# Altium PCB PCB_DataAcq.PcbDoc (part 2 of 2)
Units mm, origin at the board's own origin, x right, y up, seen from the top; angles counter-clockwise.
Board outline 85 x 89.03 mm, 4 copper layers (Top Layer, Top Ground, Bottom Ground, Bottom Layer), stack 1.58 mm thick; 137 components, 89 nets, 495 pads, 1207 vias.
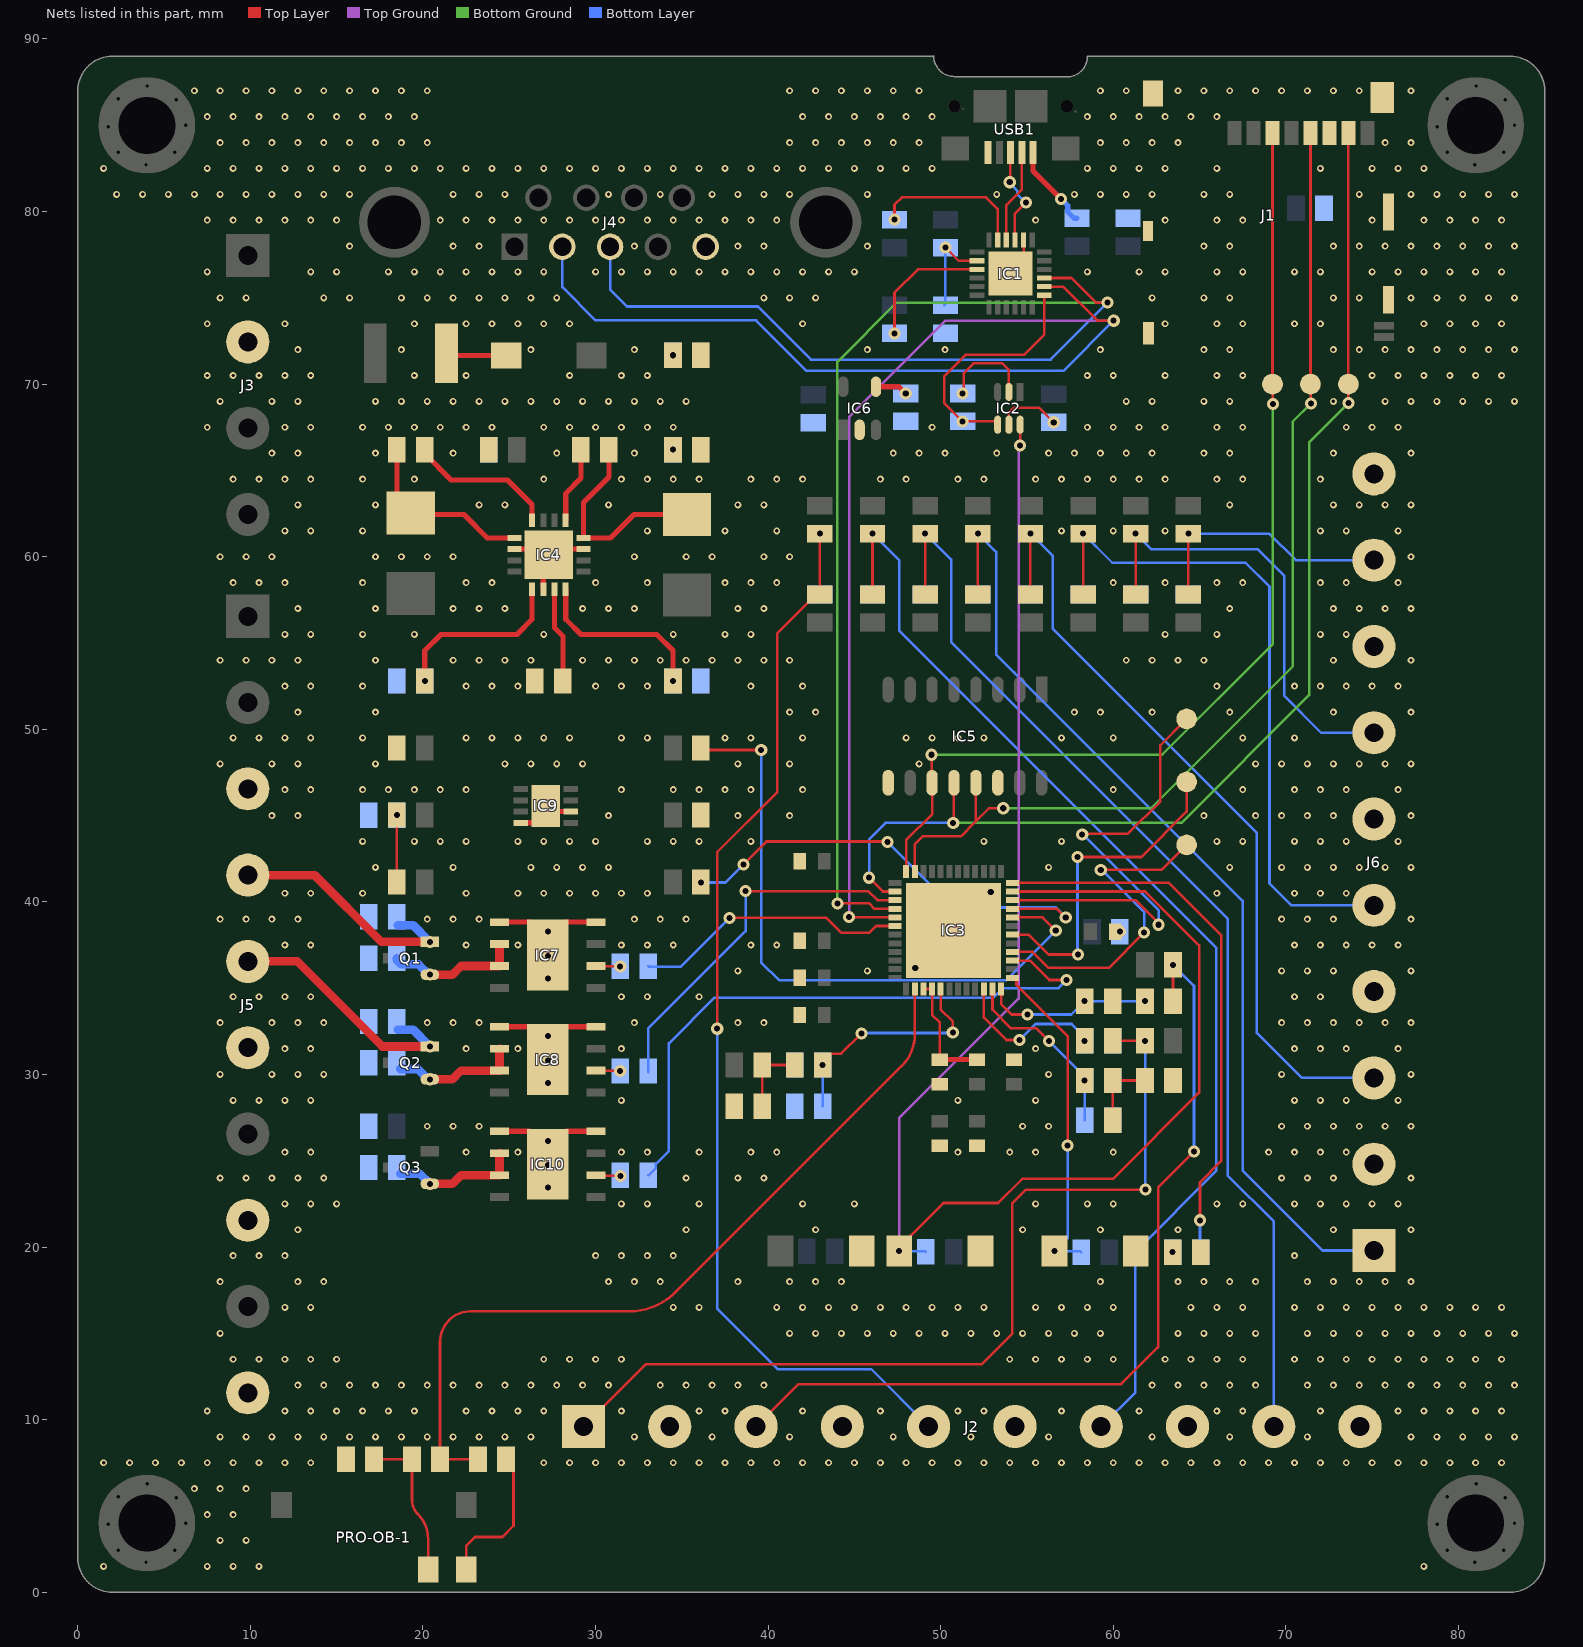
[diagram p4: the nets of this part, all layers, seen from the top]

## Via types
v1: diameter 0.4, hole 0.2, Top Layer to Bottom Layer, tented both sides, 1061 vias
v2: diameter 0.7, hole 0.35, Top Layer to Bottom Layer, tented both sides, 146 vias

## Nets (pads, with @x,y where several pads share a name; then routed paths per layer and width w, separated by ;. In a path a pad name is that pad's centre, name@x,y a point inside that pad or via, vN(x,y) a via of type N, cw(c..) or ccw(c..) an arc to the next point about the centre after c; other vN are vias at no path point) (continued)
GND: 3V3.2 5V.2 BOOT.1 C1.2 C2.2 C3.2 C4.2 C5.2 C6.1 C7.1 C8.1 C9.1 C10.2 C11.2 C12.2 C15.2 C16.1 C17.1 C18.1 C19.1 C20.1 C21.2 C24.2 C25.2 C26.1 C27.1 C28.1 C29.1 C32.1 C33.1 C34.1 C35.1 C36.1 C37.1 C38.1 C39.2 C40.1 D2.2 D3.2 IC1.2 IC1.25 IC3.49 IC4.6 IC4.10 IC4.15 IC4.17 IC5.9 IC5.14 IC6.2 IC7.4 IC7.5 IC7.9 IC8.4 IC8.5 IC8.9 IC9.2 IC9.8 IC9.9 IC10.4 IC10.5 IC10.9 J1.6 J1.11 J1.12 J1.13 J1.14 J1.15 J1.16 J2.2 J2.4 J2.6 J2.8 J2.10 J3.2 J4.5 J5.3 J5.6 J5.8 J5.10 J6.2 J6.4 J6.6 J6.8 J6.10 ON.2 PRO-OB-1.1 R21.1 R31.1 R32.1 R36.2 R39.2 R43.1 R44.1 R49.1 R50.1 R51.1 R52.1 RESET.1 START.1 USB1.5 | length 49.1
  Top Layer w0.15: PRO-OB-1.1@22.5,1.32 22.5,2.675 23.025,3.2 24.595,3.2 25.245,3.85 25.245,7.265 C16.1@24.81,7.7 ; IC1.25@54.052,76.4 54.802,77.15 IC1.2@54.802,78.35
  Top Layer w0.3: IC10.5@24.438,26.705 26.183,26.705 IC10.9@27.238,25.65 ; IC8.5@24.438,32.765 26.183,32.765 IC8.9@27.238,31.71 ; IC7.5@24.438,38.825 26.183,38.825 IC7.9@27.238,37.77 ; IC4.6@25.296,60.439 26.971,60.439 IC4.17@27.296,60.114 ; IC9.8@25.669,44.582 26.444,44.582 27.119,45.257 IC9.9@27.119,45.557 27.444,45.232 IC9.2@28.569,45.232 ; IC4.10@26.971,58.114 26.971,59.789 IC4.17@27.296,60.114 ; IC10.9@27.238,24.8 IC10.9@27.238,25.65 ; IC8.9@27.238,30.86 IC8.9@27.238,31.71 ; IC7.9@27.238,36.92 IC7.9@27.238,37.77 ; IC4.15@29.296,60.439 27.621,60.439 IC4.17@27.296,60.114 ; IC10.4@30.038,26.705 28.293,26.705 IC10.9@27.238,25.65 ; IC8.4@30.038,32.765 30.033,32.76 28.288,32.76 IC8.9@27.238,31.71 ; IC7.4@30.038,38.825 28.293,38.825 IC7.9@27.238,37.77 ; v2(48.525,36.175) 48.568,36.175 IC3.49@50.737,38.344 50.737,38.412 v2(52.9,40.575)
  other v1: 1.5,1.5 7.5,1.5 9,1.5 10.5,1.5 78,1.5 8.25,3 9.75,3 7.5,4.5 9,4.5 6.75,6 8.25,6 9.75,6 1.5,7.5 3,7.5 4.5,7.5 6,7.5 7.5,7.5 9,7.5 10.5,7.5 12,7.5 13.5,7.5 27,7.5 28.5,7.5 30,7.5 31.5,7.5 33,7.5 34.5,7.5 36,7.5 37.5,7.5 39,7.5 40.5,7.5 42,7.5 43.5,7.5 45,7.5 46.5,7.5 48,7.5 49.5,7.5 51,7.5 52.5,7.5 54,7.5 55.5,7.5 57,7.5 58.5,7.5 60,7.5 61.5,7.5 63,7.5 64.5,7.5 66,7.5 67.5,7.5 69,7.5 70.5,7.5 72,7.5 73.5,7.5 75,7.5 76.5,7.5 78,7.5 79.5,7.5 81,7.5 82.5,7.5 8.25,9 9.75,9 11.25,9 12.75,9 14.25,9 15.75,9 17.25,9 18.75,9 20.25,9 21.75,9 23.25,9 24.75,9 26.25,9 32.25,9 36.75,9 41.25,9 47.25,9 51.75,9 56.25,9 62.25,9 66.75,9 71.25,9 77.25,9 78.75,9 80.25,9 81.75,9 83.25,9 7.5,10.5 12,10.5 13.5,10.5 15,10.5 16.5,10.5 18,10.5 19.5,10.5 22.5,10.5 24,10.5 25.5,10.5 27,10.5 31.5,10.5 36,10.5 37.5,10.5 42,10.5 46.5,10.5 51,10.5 52.5,10.5 57,10.5 61.5,10.5 66,10.5 67.5,10.5 72,10.5 76.5,10.5 78,10.5 79.5,10.5 81,10.5 82.5,10.5 12.75,12 14.25,12 15.75,12 17.25,12 18.75,12 20.25,12 21.75,12 23.25,12 24.75,12 26.25,12 27.75,12 29.25,12 30.75,12 33.75,12 35.25,12 36.75,12 38.25,12 39.75,12 62.25,12 63.75,12 65.25,12 66.75,12 68.25,12 71.25,12 72.75,12 74.25,12 75.75,12 77.25,12 78.75,12 80.25,12 81.75,12 83.25,12 9,13.5 10.5,13.5 12,13.5 13.5,13.5 15,13.5 27,13.5 28.5,13.5 30,13.5 31.5,13.5 54,13.5 55.5,13.5 57,13.5 58.5,13.5 60,13.5 63,13.5 64.5,13.5 66,13.5 67.5,13.5 70.5,13.5 72,13.5 73.5,13.5 75,13.5 76.5,13.5 78,13.5 79.5,13.5 81,13.5 82.5,13.5 8.25,15 41.25,15 42.75,15 44.25,15 45.75,15 47.25,15 48.75,15 50.25,15 51.75,15 53.25,15 54.75,15 56.25,15 57.75,15 59.25,15 63.75,15 65.25,15 66.75,15 68.25,15 71.25,15 72.75,15 74.25,15 75.75,15 77.25,15 78.75,15 80.25,15 81.75,15 83.25,15 12,16.5 13.5,16.5 34.5,16.5 36,16.5 40.5,16.5 42,16.5 43.5,16.5 45,16.5 46.5,16.5 48,16.5 49.5,16.5 51,16.5 52.5,16.5 55.5,16.5 57,16.5 58.5,16.5 60,16.5 64.5,16.5 66,16.5 67.5,16.5 70.5,16.5 72,16.5 73.5,16.5 75,16.5 76.5,16.5 78,16.5 79.5,16.5 81,16.5 82.5,16.5 8.25,18 12.75,18 14.25,18 30.75,18 32.25,18 33.75,18 38.25,18 41.25,18 42.75,18 44.25,18 59.25,18 63.75,18 65.25,18 66.75,18 68.25,18 71.25,18 72.75,18 74.25,18 75.75,18 77.25,18 9,19.5 10.5,19.5 12,19.5 30,19.5 31.5,19.5 33,19.5 34.5,19.5 70.5,19.5 12.75,21 35.25,21 42.75,21 54.75,21 59.25,21 63.75,21 72.75,21 77.25,21 12,22.5 13.5,22.5 15,22.5 31.5,22.5 33,22.5 36,22.5 42,22.5 45,22.5 55.5,22.5 58.5,22.5 60,22.5 66,22.5 67.5,22.5 70.5,22.5 72,22.5 73.5,22.5 75,22.5 76.5,22.5 8.25,24 9.75,24 11.25,24 12.75,24 14.25,24 35.25,24 38.25,24 39.75,24 69.75,24 71.25,24 72.75,24 77.25,24 12,25.5 13.5,25.5 22.5,25.5 25.5,25.5 31.5,25.5 33,25.5 36,25.5 39,25.5 40.5,25.5 51,25.5 54,25.5 55.5,25.5 60,25.5 69,25.5 70.5,25.5 72,25.5 73.5,25.5 20.25,27 21.75,27 23.25,27 54.75,27 56.25,27 69.75,27 71.25,27 72.75,27 74.25,27 75.75,27 77.25,27 9,28.5 10.5,28.5 12,28.5 13.5,28.5 31.5,28.5 51,28.5 55.5,28.5 70.5,28.5 72,28.5 73.5,28.5 76.5,28.5 8.25,30 11.25,30 12.75,30 14.25,30 56.25,30 69.75,30 77.25,30 12,31.5 13.5,31.5 22.5,31.5 25.5,31.5 31.5,31.5 55.5,31.5 70.5,31.5 72,31.5 73.5,31.5 76.5,31.5 8.25,33 11.25,33 12.75,33 14.25,33 20.25,33 21.75,33 23.25,33 32.25,33 38.25,33 39.75,33 69.75,33 71.25,33 72.75,33 74.25,33 75.75,33 77.25,33 9,34.5 10.5,34.5 12,34.5 13.5,34.5 31.5,34.5 33,34.5 36,34.5 70.5,34.5 72,34.5 38.25,36 45.75,36 69.75,36 71.25,36 72.75,36 77.25,36 12,37.5 13.5,37.5 22.5,37.5 25.5,37.5 31.5,37.5 33,37.5 34.5,37.5 39,37.5 40.5,37.5 70.5,37.5 72,37.5 73.5,37.5 75,37.5 76.5,37.5 8.25,39 9.75,39 11.25,39 12.75,39 20.25,39 21.75,39 23.25,39 32.25,39 33.75,39 35.25,39 69.75,39 71.25,39 72.75,39 77.25,39 12,40.5 13.5,40.5 16.5,40.5 22.5,40.5 25.5,40.5 27,40.5 28.5,40.5 30,40.5 31.5,40.5 33,40.5 66,40.5 70.5,40.5 72,40.5 73.5,40.5 17.25,42 21.75,42 26.25,42 27.75,42 29.25,42 30.75,42 56.25,42 66.75,42 69.75,42 71.25,42 72.75,42 74.25,42 75.75,42 77.25,42 16.5,43.5 19.5,43.5 21,43.5 22.5,43.5 25.5,43.5 27,43.5 28.5,43.5 30,43.5 33,43.5 34.5,43.5 36,43.5 39,43.5 52.5,43.5 57,43.5 66,43.5 67.5,43.5 70.5,43.5 72,43.5 73.5,43.5 76.5,43.5 11.25,45 12.75,45 30.75,45 38.25,45 41.25,45 65.25,45 68.25,45 69.75,45 71.25,45 72.75,45 77.25,45 12,46.5 13.5,46.5 16.5,46.5 18,46.5 19.5,46.5 21,46.5 22.5,46.5 31.5,46.5 34.5,46.5 36,46.5 37.5,46.5 39,46.5 42,46.5 60,46.5 67.5,46.5 70.5,46.5 72,46.5 73.5,46.5 76.5,46.5 8.25,48 11.25,48 12.75,48 17.25,48 24.75,48 26.25,48 27.75,48 29.25,48 38.25,48 41.25,48 48.75,48 68.25,48 69.75,48 71.25,48 72.75,48 74.25,48 75.75,48 77.25,48 9,49.5 10.5,49.5 12,49.5 13.5,49.5 16.5,49.5 22.5,49.5 24,49.5 25.5,49.5 27,49.5 28.5,49.5 31.5,49.5 33,49.5 37.5,49.5 39,49.5 42,49.5 48,49.5 49.5,49.5 51,49.5 52.5,49.5 57,49.5 60,49.5 67.5,49.5 70.5,49.5 12.75,51 17.25,51 41.25,51 42.75,51 57.75,51 59.25,51 62.25,51 66.75,51 72.75,51 77.25,51 12,52.5 13.5,52.5 16.5,52.5 22.5,52.5 24,52.5 25.5,52.5 30,52.5 31.5,52.5 33,52.5 39,52.5 42,52.5 66,52.5 70.5,52.5 72,52.5 73.5,52.5 75,52.5 76.5,52.5 8.25,54 9.75,54 11.25,54 12.75,54 17.25,54 21.75,54 23.25,54 24.75,54 26.25,54 29.25,54 30.75,54 32.25,54 33.75,54 35.25,54 36.75,54 38.25,54 39.75,54 41.25,54 60.75,54 62.25,54 63.75,54 65.25,54 72.75,54 77.25,54 12,55.5 13.5,55.5 16.5,55.5 19.5,55.5 27,55.5 34.5,55.5 37.5,55.5 39,55.5 63,55.5 66,55.5 72,55.5 73.5,55.5 12.75,57 17.25,57 21.75,57 23.25,57 24.75,57 29.25,57 30.75,57 32.25,57 38.25,57 39.75,57 66.75,57 72.75,57 74.25,57 75.75,57 77.25,57 9,58.5 10.5,58.5 12,58.5 16.5,58.5 22.5,58.5 24,58.5 30,58.5 33,58.5 37.5,58.5 39,58.5 40.5,58.5 60,58.5 63,58.5 66,58.5 67.5,58.5 72,58.5 73.5,58.5 76.5,58.5 8.25,60 9.75,60 11.25,60 17.25,60 18.75,60 20.25,60 21.75,60 32.25,60 35.25,60 36.75,60 39.75,60 41.25,60 77.25,60 12,61.5 13.5,61.5 16.5,61.5 33,61.5 37.5,61.5 40.5,61.5 57,61.5 60,61.5 63,61.5 72,61.5 73.5,61.5 76.5,61.5 12.75,63 17.25,63 23.25,63 24.75,63 30.75,63 38.25,63 39.75,63 66.75,63 72.75,63 74.25,63 75.75,63 77.25,63 9,64.5 10.5,64.5 12,64.5 13.5,64.5 16.5,64.5 19.5,64.5 27,64.5 31.5,64.5 33,64.5 34.5,64.5 36,64.5 39,64.5 40.5,64.5 42,64.5 46.5,64.5 48,64.5 51,64.5 52.5,64.5 55.5,64.5 57,64.5 58.5,64.5 60,64.5 61.5,64.5 63,64.5 66,64.5 67.5,64.5 72,64.5 11.25,66 12.75,66 17.25,66 21.75,66 27.75,66 32.25,66 47.25,66 48.75,66 50.25,66 53.25,66 56.25,66 57.75,66 59.25,66 60.75,66 62.25,66 65.25,66 66.75,66 72.75,66 77.25,66 7.5,67.5 12,67.5 13.5,67.5 16.5,67.5 18,67.5 19.5,67.5 21,67.5 22.5,67.5 24,67.5 27,67.5 28.5,67.5 30,67.5 31.5,67.5 33,67.5 34.5,67.5 49.5,67.5 58.5,67.5 60,67.5 61.5,67.5 63,67.5 66,67.5 67.5,67.5 73.5,67.5 75,67.5 76.5,67.5 8.25,69 11.25,69 12.75,69 17.25,69 18.75,69 20.25,69 21.75,69 23.25,69 24.75,69 26.25,69 27.75,69 29.25,69 30.75,69 32.25,69 33.75,69 35.25,69 60.75,69 62.25,69 65.25,69 66.75,69 72.75,69 75.75,69 77.25,69 78.75,69 80.25,69 81.75,69 83.25,69 7.5,70.5 9,70.5 10.5,70.5 12,70.5 13.5,70.5 19.5,70.5 22.5,70.5 28.5,70.5 31.5,70.5 33,70.5 58.5,70.5 60,70.5 63,70.5 66,70.5 67.5,70.5 75,70.5 76.5,70.5 78,70.5 79.5,70.5 81,70.5 82.5,70.5 12.75,72 18.75,72 26.25,72 32.25,72 45.75,72 50.25,72 59.25,72 65.25,72 66.75,72 72.75,72 74.25,72 75.75,72 77.25,72 78.75,72 80.25,72 81.75,72 83.25,72 7.5,73.5 12,73.5 19.5,73.5 22.5,73.5 24,73.5 25.5,73.5 27,73.5 28.5,73.5 42,73.5 63,73.5 66,73.5 67.5,73.5 70.5,73.5 72,73.5 78,73.5 79.5,73.5 81,73.5 82.5,73.5 8.25,75 9.75,75 14.25,75 15.75,75 18.75,75 20.25,75 21.75,75 23.25,75 24.75,75 26.25,75 27.75,75 39.75,75 41.25,75 42.75,75 62.25,75 65.25,75 66.75,75 72.75,75 74.25,75 77.25,75 78.75,75 80.25,75 81.75,75 83.25,75 7.5,76.5 13.5,76.5 15,76.5 18,76.5 19.5,76.5 21,76.5 22.5,76.5 24,76.5 25.5,76.5 27,76.5 30,76.5 31.5,76.5 33,76.5 34.5,76.5 36,76.5 37.5,76.5 39,76.5 40.5,76.5 42,76.5 43.5,76.5 45,76.5 58.5,76.5 61.5,76.5 63,76.5 66,76.5 67.5,76.5 70.5,76.5 72,76.5 75,76.5 76.5,76.5 78,76.5 79.5,76.5 81,76.5 82.5,76.5 15.75,78 21.75,78 23.25,78 32.25,78 38.25,78 39.75,78 45.75,78 65.25,78 66.75,78 72.75,78 74.25,78 75.75,78 77.25,78 78.75,78 80.25,78 81.75,78 83.25,78 7.5,79.5 9,79.5 10.5,79.5 12,79.5 13.5,79.5 15,79.5 21,79.5 22.5,79.5 24,79.5 25.5,79.5 27,79.5 28.5,79.5 30,79.5 31.5,79.5 33,79.5 34.5,79.5 36,79.5 37.5,79.5 39,79.5 40.5,79.5 55.5,79.5 63,79.5 66,79.5 67.5,79.5 75,79.5 78,79.5 79.5,79.5 81,79.5 82.5,79.5 2.25,81 3.75,81 5.25,81 6.75,81 8.25,81 9.75,81 11.25,81 12.75,81 14.25,81 15.75,81 21.75,81 23.25,81 24.75,81 30.75,81 33.75,81 36.75,81 38.25,81 39.75,81 41.25,81 45.75,81 53.25,81 57.75,81 59.25,81 60.75,81 62.25,81 65.25,81 66.75,81 74.25,81 77.25,81 78.75,81 80.25,81 81.75,81 83.25,81 1.5,82.5 7.5,82.5 9,82.5 10.5,82.5 12,82.5 13.5,82.5 15,82.5 16.5,82.5 18,82.5 19.5,82.5 21,82.5 22.5,82.5 24,82.5 25.5,82.5 27,82.5 28.5,82.5 30,82.5 31.5,82.5 33,82.5 34.5,82.5 36,82.5 37.5,82.5 39,82.5 40.5,82.5 42,82.5 43.5,82.5 45,82.5 46.5,82.5 48,82.5 49.5,82.5 58.5,82.5 60,82.5 61.5,82.5 63,82.5 66,82.5 72,82.5 75,82.5 76.5,82.5 78,82.5 8.25,84 9.75,84 11.25,84 12.75,84 14.25,84 15.75,84 17.25,84 18.75,84 20.25,84 41.25,84 42.75,84 44.25,84 45.75,84 47.25,84 48.75,84 59.25,84 60.75,84 62.25,84 63.75,84 75.75,84 77.25,84 7.5,85.5 9,85.5 10.5,85.5 12,85.5 13.5,85.5 15,85.5 16.5,85.5 18,85.5 19.5,85.5 42,85.5 43.5,85.5 45,85.5 46.5,85.5 48,85.5 49.5,85.5 58.5,85.5 60,85.5 61.5,85.5 63,85.5 64.5,85.5 66,85.5 6.75,87 8.25,87 9.75,87 11.25,87 12.75,87 14.25,87 15.75,87 17.25,87 18.75,87 20.25,87 41.25,87 42.75,87 44.25,87 45.75,87 47.25,87 48.75,87 59.25,87 60.75,87 63.75,87 65.25,87 66.75,87 68.25,87 69.75,87 71.25,87 72.75,87 74.25,87 77.25,87
  other v2: 27.25,23.44 27.25,24.74 27.245,26.155 27.25,29.5 27.25,30.8 27.245,32.215 27.25,35.56 27.25,36.86 27.245,38.275 60.385,38.275
I33: IC3.13 R33.1 START.2 | length 19.1
  Top Layer w0.15: IC3.13@54.15,35.6 54.291,35.6 54.391,35.5 54.391,35.184 57.35,32.225 v2(57.35,25.875)
  Bottom Layer w0.15: v2(57.35,25.875) 57.35,20.514 v2(56.6,19.764) 58.076,19.764 R33.1@58.14,19.7
I34: C28.2 IC3.10 R29.1 | length 9
  Top Layer w0.15: IC3.10@52.5,34.95 52.5,34.435 52.5,33.3 53.804,31.996 v2(54.575,31.996)
  Bottom Layer w0.15: v2(54.575,31.996) 55.504,32.925 57.59,32.925 58.34,32.175 v2(58.34,31.95)
I35: C29.2 D3.1 IC3.11 R30.1 | length 10.7
  Top Layer w0.15: IC3.11@53,34.95 53,34.435 53,33.75 54.075,32.675 55.54,32.675 v2(56.265,31.95)
  Bottom Layer w0.15: v2(56.265,31.95) 58.34,29.875 v2(58.34,29.65) D3.1@58.34,27.35
I36: C27.2 D2.1 IC3.5 R28.1 | length 13.7
  Top Layer w0.15: v2(43.16,30.55) 43.442,30.832 43.442,31.057 43.595,31.21 44.231,31.21 v2(45.399,32.378) ; IC3.5@50,34.95 50,33.775 50.7,33.075 v2(50.7,32.425)
  Bottom Layer w0.15: C27.2@43.162,28.15 D2.1@43.162,30.548 ; v2(45.399,32.378) 45.422,32.401 50.676,32.401 v2(50.7,32.425)
IO0: BOOT.2 IC2.6 IC3.23 R34.1 | length 94.3
  Top Layer w0.15: v2(47.596,19.764) 48.271,20.439 48.271,20.671 50.15,22.55 53.325,22.55 54.725,23.95 59.975,23.95 64.975,28.95 64.975,37.475 61.85,40.6 54.8,40.6 ; IC3.23@54.15,40.6 54.8,40.6 ; v2(54.6,66.45) 54.601,66.451 54.601,67.649 IC2.6@54.602,67.65
  Top Ground w0.15: v2(47.596,19.764) 47.596,27.471 54.521,34.396 54.521,66.371 v2(54.6,66.45)
  Bottom Layer w0.15: v2(47.596,19.764) 49.101,19.764 R34.1@49.14,19.725
IO2: IC3.22 IO2.1 | length 26.9
  Top Layer w0.15: IC3.22@54.15,40.1 61.3,40.1 62.625,38.775 v2(62.625,38.675) ; v2(58.2,43.896) 58.254,43.95 60.85,43.95 62.725,45.825 62.725,49.075 IO2.1@64.25,50.6
  Bottom Layer w0.15: v2(58.2,43.896) 58.254,43.896 62.625,39.525 v2(62.625,38.675)
IO4: IC3.24 R42.2 | length 32.2
  Top Layer w0.15: IC3.24@54.15,41.1 63.225,41.1 66.25,38.075 66.25,24.975 65.025,23.75 v2(65.025,21.55)
  Bottom Layer w0.15: v2(65.025,21.55) 65.025,19.735 R42.2@65.06,19.7
IO12: IC3.18 IO12.1 | length 19.1
  Top Layer w0.15: IC3.18@54.15,38.1 55.1,38.1 56.25,36.95 v2(57.95,36.95) ; v2(57.925,42.6) 61.625,42.6 64.25,45.225 IO12.1@64.25,46.95
  Bottom Layer w0.15: v2(57.925,42.6) 57.926,42.599 57.926,36.974 v2(57.95,36.95)
IO13: IC3.20 R48.2 | length 37.4
  Top Layer w0.15: R48.2@36.106,48.917 36.223,48.8 v2(39.6,48.8) ; IC3.20@54.15,39.1 55.906,39.1 56.663,38.342 v2(56.667,38.342)
  Bottom Layer w0.15: v2(39.6,48.8) 39.6,36.5 40.65,35.45 53.775,35.45 v2(56.667,38.342)
IO15: IC3.21 R47.2 | length 27.3
  Top Layer w0.15: v2(36.1,41.125) 36.1,41.144 R47.2@36.106,41.15 ; v2(38.575,42.175) 39.9,43.5 46.9,43.5 v2(46.925,43.475) ; IC3.21@54.15,39.6 56.747,39.6 v2(57.247,39.1)
  Bottom Layer w0.15: v2(36.1,41.125) 37.525,41.125 v2(38.575,42.175) ; v2(46.925,43.475) 50.725,39.675 56.672,39.675 v2(57.247,39.1)
IO21: IC3.42 R54.2 | length 16
  Top Layer w0.15: v2(37.773,39.075) 43.375,39.075 44.246,38.204 45.854,38.204 46.25,38.6 IC3.42@47.35,38.6
  Bottom Layer w0.15: R54.2@33.06,36.275 33.085,36.25 34.948,36.25 v2(37.773,39.075)
IO22: IC3.39 R53.2 | length 21.7
  Top Layer w0.15: v2(38.7,40.625) 45.8,40.625 46.325,40.1 IC3.39@47.35,40.1
  Bottom Layer w0.15: R53.2@33.05,30.139 33.05,32.65 38.7,38.3 v2(38.7,40.625)
IO26: IC3.15 R55.2 | length 36.3
  Top Layer w0.15: IC3.15@54.15,36.6 55.175,36.6 56.3,35.475 v2(57.3,35.475)
  Bottom Layer w0.15: R55.2@33.06,24.15 33.495,24.585 33.495,24.82 34.25,25.575 34.25,31.8 36.9,34.45 53.05,34.45 53.604,35.004 56.829,35.004 v2(57.3,35.475)
IO27: IC3.16 IO27.1 | length 19.2
  Top Layer w0.15: IC3.16@54.15,37.1 55.325,37.1 56.25,36.175 59.75,36.175 v2(61.79,38.215) ; v2(59.275,41.85) 62.8,41.85 IO27.1@64.25,43.3
  Bottom Layer w0.15: v2(59.275,41.85) 59.35,41.85 61.79,39.411 v2(61.79,38.215)
IO32: C26.2 IC3.12 R27.1 | length 9.8
  Top Layer w0.15: IC3.12@53.5,34.95 53.504,34.946 53.504,34.071 54.1,33.475 v2(55.025,33.475)
  Bottom Layer w0.15: v2(55.025,33.475) 57.565,33.475 v2(58.34,34.25) v2(61.84,34.25)
MISO: IC3.38 IC5.12 J1.7 MISO.1 | length 68.9
  Top Layer w0.15: v2(45.85,41.4) 46.65,40.6 IC3.38@47.35,40.6 ; v2(50.725,44.575) 50.747,44.597 50.747,46.877 IC5.12@50.77,46.9 ; v2(73.625,68.9) 73.626,69.999 J1.7@73.626,84.55
  Bottom Ground w0.15: v2(50.725,44.575) 63.95,44.575 71.35,51.975 71.35,66.625 v2(73.625,68.9)
  Bottom Layer w0.15: v2(45.85,41.4) 45.85,43.625 46.8,44.575 v2(50.725,44.575)
MOSI: IC3.36 IC5.11 J1.3 MOSI.1 | length 59.5
  Top Layer w0.15: IC3.36@48,41.75 48,43.575 49.5,45.075 IC5.11@49.5,46.9 49.487,46.912 49.487,48.513 v2(49.475,48.525) ; J1.3@69.226,84.55 MOSI.1@69.226,70 69.238,69.988 69.238,68.862 v2(69.25,68.85)
  Bottom Ground w0.15: v2(49.475,48.525) 62.825,48.525 69.25,54.95 v2(69.25,68.85)
Net3V3_1: 3V3.1 R35.1 | length 0
  Bottom Layer w0.3: v2(34.486,66.203) 34.487,66.203 R35.1@34.49,66.2
Net5V_1: 5V.1 R38.1 | length 0
  Top Layer w0.3: 5V.1@34.486,71.665 34.49,71.669 v2(34.49,71.675)
NetC5_1: C5.1 IC3.3 IC3.4 L1.2 | length 6.9
  Top Layer w0.15: IC3.3@49,34.95 IC3.4@49.5,34.95 49.5,33.45 49.95,33 C5.1@49.95,30.86
  Top Layer w0.3: C5.1@49.95,30.86 L1.2@52.1,30.86
NetC15_1: C15.1 L2.1 PRO-OB-1.2 | length 8.8
  Top Layer w0.15: C15.1@17.16,7.7 L2.1@19.365,7.7 19.365,5.334 ccw(c20.509,5.334) 19.7,4.525 cw(c18.251,3.076) 20.3,3.076 PRO-OB-1.2@20.3,1.32
NetC16_2: C16.2 IC3.2 L2.2 | length 47.2
  Top Layer w0.15: 20.985,14.469 L2.2@20.985,7.7 C16.2@23.19,7.7 ; 20.985,14.47 cw(c22.829,14.471) 21.525,15.775 cw(c22.732,14.568) 22.732,16.275 ; 22.733,16.275 31.943,16.275 ccw(c31.943,20.095) 34.644,17.394 47.756,30.506 ccw(c45.96,32.302) 48.5,32.302 IC3.2@48.5,34.95
NetC30_1: C30.1 IC4.5 L3.2 | length 10.6
  Top Layer w0.3: C30.1@18.486,66.2 18.486,63.337 L3.2@19.296,62.527 ; L3.2@19.296,62.446 22.371,62.446 23.728,61.089 IC4.5@25.296,61.089
NetC30_2: C30.2 IC4.4 | length 8.6
  Top Layer w0.3: C30.2@20.106,66.2 20.106,65.975 21.631,64.45 24.9,64.45 26.321,63.029 IC4.4@26.321,62.114
NetC31_1: C31.1 IC4.1 | length 4.5
  Top Layer w0.3: IC4.1@28.271,62.114 28.271,63.671 29.153,64.553 C31.1@29.153,66.2
NetC31_2: C31.2 IC4.16 L4.1 | length 12.3
  Top Layer w0.3: C31.2@30.773,66.2 30.773,64.623 29.296,63.146 IC4.16@29.296,61.089 30.864,61.089 32.221,62.446 L4.1@35.296,62.446
NetC36_2: C36.2 IC4.11 | length 5.5
  Top Layer w0.3: IC4.11@27.621,58.114 27.621,55.879 28.106,55.394 C36.2@28.106,52.8
NetC38_2: C38.2 IC6.4 | length 1.9
  Top Layer w0.3: IC6.4@46.25,69.85 47.585,69.85 v2(47.975,69.46)
NetC40_2: C40.2 R45.2 R46.1 | length 3.9
  Top Layer w0.15: R45.2@18.486,41.15 R45.2@18.486,41.15 v2(18.485,45.025) 18.486,45.026 R46.1@18.486,45.033
NetD1_2: D1.2 USB1.1 | length 5
  Top Layer w0.3: USB1.1@55.35,83.425 55.35,82.35 v2(56.975,80.725)
  Bottom Layer w0.3: v2(56.975,80.725) 56.982,80.725 57.358,80.349 57.358,79.97 57.718,79.61 D1.2@57.9,79.61
NetD4_2: D4.2 F1.2 | length 3.5
  Top Layer w0.3: F1.2@21.488,71.662 D4.2@24.823,71.662
  Top Layer w1: F1.2@21.361,71.789 F1.2@21.488,71.662
NetIC1_5: IC1.5 R9.2 | length 9.1
  Top Layer w0.15: v2(47.325,79.533) 47.325,80.4 47.75,80.825 52.625,80.825 53.302,80.148 IC1.5@53.302,78.35
NetIC1_8: IC1.8 R21.2 R22.1 | length 5.5
  Top Layer w0.15: v2(50.275,77.913) 51.038,77.15 IC1.8@52.102,77.15
  Bottom Layer w0.15: R21.2@50.2,74.56 50.275,74.635 v2(50.275,77.913)
NetIC1_9: IC1.9 R19.2 | length 7.7
  Top Layer w0.15: v2(47.325,72.94) 47.325,75.3 48.675,76.65 IC1.9@52.102,76.65
NetIC2_2: IC2.2 R14.2 | length 5.5
  Top Layer w0.15: v2(51.275,69.46) 51.325,69.51 51.325,70.625 51.9,71.2 53.575,71.2 53.952,70.823 IC2.2@53.952,69.55
NetIC2_5: IC2.5 R20.1 | length 3.8
  Top Layer w0.15: IC2.5@53.952,67.65 53.952,68.352 54.225,68.625 55.715,68.625 v2(56.55,67.79)
NetIC4_9: IC4.9 R39.1 R40.2 | length 10.5
  Top Layer w0.3: v2(20.106,52.8) 20.106,54.564 21.042,55.5 25.442,55.5 26.321,56.379 IC4.9@26.321,58.114
  Bottom Layer w0.3: v2(20.106,52.8) R39.1@20.11,52.8
NetIC4_12: IC4.12 R36.1 R37.2 | length 10.5
  Top Layer w0.3: IC4.12@28.271,58.114 28.271,56.379 29.15,55.5 33.55,55.5 34.486,54.564 v2(34.486,52.8)
NetIC7_2: IC7.2 R54.1 | length 1.4
  Top Layer w0.15: IC7.2@30.058,36.265 v2(31.43,36.265)
NetIC7_6: IC7.6 IC7.7 Q1.1 R43.2 | length 7.9
  Top Layer w0.5: v2(20.396,35.78) 21.705,35.78 22.21,36.285 IC7.7@24.438,36.285 IC7.6@24.438,37.555
  Bottom Layer w0.5: R43.2@18.485,36.73 18.485,36.637 18.745,36.377 19.745,36.377 20.342,35.78 v2(20.396,35.78) v2@20.396,35.834
NetIC8_2: IC8.2 R53.1 | length 1.4
  Top Layer w0.15: IC8.2@30.058,30.205 v2(31.43,30.205)
NetIC8_6: IC8.6 IC8.7 Q2.1 R49.2 | length 7.5
  Top Layer w0.5: v2(20.396,29.72) 21.705,29.72 22.21,30.225 IC8.7@24.438,30.225 IC8.6@24.438,31.495
  Bottom Layer w0.5: R49.2@18.691,30.317 19.691,30.317 v2@20.288,29.72 ; v2@20.342,29.72 v2(20.396,29.72) v2@20.396,29.774
NetIC10_2: IC10.2 R55.1 | length 1.5
  Top Layer w0.15: IC10.2@30.038,24.165 30.078,24.125 v2(31.45,24.125)
  Bottom Layer w0.15: R55.1@31.44,24.15 31.45,24.14 v2(31.45,24.125)
NetIC10_6: IC10.6 IC10.7 Q3.1 R51.2 | length 7.5
  Top Layer w0.5: v2(20.396,23.66) 21.705,23.66 22.21,24.165 IC10.7@24.438,24.165 IC10.6@24.438,25.435
  Bottom Layer w0.5: R51.2@18.691,24.257 19.799,24.257 v2(20.396,23.66)
NetON_1: ON.1 R42.1 | length 0
  other v2: 63.44,19.7
NetR24_1: R24.1 R28.2 R31.2 | length 4.3
  Top Layer w0.15: R31.2@39.66,28.15 R24.1@39.66,30.55 R28.2@41.54,30.55
NetR26_1: R26.1 R30.2 R32.2 | length 4.2
  Top Layer w0.15: R26.1@59.96,27.35 R30.2@59.96,29.65 R32.2@61.84,29.65
NTC0: J6.9 R1.1 R5.2 | length 14.9
  Top Layer w0.15: R5.2@64.35,57.81 v2(64.35,61.34)
  Bottom Layer w0.15: v2(64.35,61.34) 69.035,61.34 70.575,59.8 J6.9@75.1,59.8
NTC1: J6.7 R2.1 R6.2 | length 26.2
  Top Layer w0.15: R6.2@61.3,57.81 v2(61.3,61.34)
  Bottom Layer w0.15: v2(61.3,61.34) 62.215,60.425 68.375,60.425 69.9,58.9 69.9,51.95 72.05,49.8 J6.7@75.1,49.8
NTC2: J6.5 R3.1 R7.2 | length 39.4
  Top Layer w0.15: R7.2@58.25,57.81 v2(58.25,61.34)
  Bottom Layer w0.15: v2(58.25,61.34) 59.94,59.65 67.675,59.65 69.05,58.275 69.05,41.075 70.325,39.8 J6.5@75.1,39.8
NTC3: J6.3 R4.1 R8.2 | length 45.8
  Top Layer w0.15: R8.2@55.2,57.81 v2(55.2,61.34)
  Bottom Layer w0.15: v2(55.2,61.34) 56.5,60.04 56.5,55.825 68.325,44 68.325,32.4 70.925,29.8 J6.3@75.1,29.8
NTC4: J6.1 R10.1 R15.2 | length 56.3
  Top Layer w0.15: R15.2@52.15,57.81 v2(52.15,61.34)
  Bottom Layer w0.15: v2(52.15,61.34) 53.214,60.276 53.214,54.336 54.25,53.3 67.5,40.05 67.5,24.425 72.125,19.8 J6.1@75.1,19.8
NTC5: J2.9 R11.1 R16.2 | length 63.6
  Top Layer w0.15: R16.2@49.1,57.81 v2(49.1,61.34)
  Bottom Layer w0.15: v2(49.1,61.34) 50.6,59.84 50.6,55.05 66.625,39.025 66.625,24.15 69.3,21.475 J2.9@69.3,9.6
NTC6: J2.7 R12.1 R17.2 | length 66.3
  Top Layer w0.15: R17.2@46.05,57.81 v2(46.05,61.34)
  Bottom Layer w0.15: v2(46.05,61.34) 47.6,59.79 47.6,55.7 65.975,37.325 65.975,24.425 61.275,19.725 61.275,11.575 J2.7@59.3,9.6
NTC7: J2.5 R13.1 R18.2 | length 62.6
  Top Layer w0.15: v2(37.05,32.65) 37.05,42.875 40.525,46.35 40.525,55.56 42.775,57.81 R18.2@43,57.81 v2(43,61.34)
  Bottom Layer w0.15: v2(37.05,32.65) 37.05,16.425 40.55,12.925 45.975,12.925 J2.5@49.3,9.6
NTC8: J2.3 R23.1 R27.2 | length 50.8
  Top Layer w0.15: J2.3@39.3,9.6 41.75,12.05 60.45,12.05 62.601,14.201 62.601,23.451 v2(64.675,25.525) ; R27.2@63.46,34.25 v2(63.46,36.35)
  Bottom Layer w0.15: v2(63.46,36.35) 64.675,35.135 v2(64.675,25.525)
NTC9: J2.1 R25.1 R29.2 | length 53.2
  Top Layer w0.15: J2.1@29.3,9.6 32.9,13.2 52.375,13.2 54.141,14.966 54.141,22.516 54.95,23.325 v2(61.875,23.325) ; R29.2@59.96,31.95 v2(61.84,31.95)
  Bottom Layer w0.15: v2(61.84,31.95) 61.857,31.932 61.857,23.343 v2(61.875,23.325)
PWM_WP: J5.4 Q1.2 R44.2 | length 14.4
  Top Layer w0.5: J5.4@9.85,41.55 13.725,41.55 17.595,37.68 v2(20.396,37.68)
  Bottom Layer w0.5: R44.2@18.555,38.645 19.431,38.645 v2(20.396,37.68)
PWR_FAN: J5.5 Q2.2 R50.2 | length 14.8
  Top Layer w0.5: J5.5@9.85,36.55 12.725,36.55 17.655,31.62 v2(20.396,31.62)
  Bottom Layer w0.5: R50.2@18.555,32.585 19.431,32.585 v2(20.396,31.62)
RTS: IC1.19 IC2.4 R14.1 | length 14.3
  Top Layer w0.15: IC2.4@53.302,67.65 53.302,67.725 53.187,67.84 v2(51.275,67.84) 50.2,68.915 50.2,70.45 51.45,71.7 54.825,71.7 56.002,72.877 IC1.19@56.002,75.15
RXD0: IC1.21 IC3.40 J4.3 | length 90.6
  Top Layer w0.15: v2(44.014,39.9) 44.039,39.925 45.85,39.925 46.175,39.6 IC3.40@47.35,39.6 ; IC1.21@56.002,76.15 57.575,76.15 59,74.725 v2(59.675,74.725)
  Bottom Ground w0.15: v2(44.014,39.9) 44.014,71.289 47.45,74.725 v2(59.675,74.725)
  Bottom Layer w0.15: J4.3@30.845,77.96 30.845,75.48 31.825,74.5 39.4,74.5 42.475,71.425 56.375,71.425 v2(59.675,74.725)
SCLK: IC3.35 IC5.13 J1.5 SCLK.1 | length 61.4
  Top Layer w0.15: IC3.35@48.5,41.75 48.5,43.35 48.95,43.8 51.175,43.8 52.025,44.65 ; IC5.13@52.04,46.9 52.025,46.885 52.025,44.65 ; v2(53.625,45.425) 52.8,45.425 52.025,44.65 ; J1.5@71.426,84.55 SCLK.1@71.426,70 71.438,69.988 71.438,68.887 v2(71.45,68.875)
  Bottom Ground w0.15: v2(53.625,45.425) 62.175,45.425 70.4,53.65 70.4,67.825 v2(71.45,68.875)
TXD0: IC1.20 IC3.41 J4.2 | length 91.6
  Top Layer w0.15: v2(44.675,39.125) 44.7,39.1 IC3.41@47.35,39.1 ; IC1.20@56.002,75.65 57.1,75.65 59.075,73.675 v2(60.025,73.675)
  Top Ground w0.15: v2(44.675,39.125) 44.693,39.143 44.693,68.093 50.275,73.675 v2(60.025,73.675)
  Bottom Layer w0.15: J4.2@28.075,77.96 28.075,75.625 30,73.7 39.3,73.7 42.225,70.775 57.125,70.775 v2(60.025,73.675)
USB_N: IC1.4 USB1.2 | length 5.4
  Top Layer w0.15: IC1.4@53.802,78.35 53.802,80.377 54.7,81.275 USB1.2@54.7,83.425
USB_P: IC1.3 USB1.3 | length 5.8
  Top Layer w0.15: v2(54,81.7) 54.025,81.725 54.025,83.4 USB1.3@54.05,83.425 ; IC1.3@54.302,78.35 54.302,79.877 v2(54.95,80.525)
  Bottom Layer w0.15: v2(54,81.7) 54,81.65 54.435,81.215 54.435,81.028 54.938,80.525 v2(54.95,80.525)
pads on no net: IC1.1 IC1.10 IC1.11 IC1.12 IC1.13 IC1.14 IC1.15 IC1.16 IC1.17 IC1.18 IC1.22 IC1.24 IC3.6 IC3.7 IC3.8 IC3.17 IC3.25 IC3.26 IC3.27 IC3.28 IC3.29 IC3.30 IC3.31 IC3.32 IC3.33 IC3.44 IC3.45 IC3.47 IC3.48 IC4.8 IC4.13 IC7.3 IC8.3 IC10.3 J1.1 J1.8 J1.9 J1.10 J4.1 J4.4 J4.6 J4.7 J4.8 J4.9 J4.NC PRO-OB-1.3 PRO-OB-1.4 SV1.1 SV1.2 SV2.1 SV2.2 SV3.1 SV3.2 SV4.1 SV4.2 USB1. USB1.4 USB1.6 USB1.7 USB1.8 USB1.9 USB1.10 USB1.11

## Polygon pours and split planes (outlines as drawn)
GND on Bottom Ground "GND_L03_P006" (solid, pour order 6): 0,2 0,87 cw(c2,87) 2,89 49.595,89 49.595,89.025 ccw(c50.795,89.025) 50.795,87.825 57.305,87.8 ccw(c57.305,89) 58.505,89 83,89 cw(c83,87) 85,87 85,2 cw(c83,2) 83,0 2,0 cw(c2,2)
GND on Bottom Layer "GND_L04_P007" (solid, pour order 7): 0,2 0,87 cw(c2,87) 2,89 49.595,89 49.595,89.025 ccw(c50.795,89.025) 50.795,87.825 57.305,87.8 ccw(c57.305,89) 58.505,89 83,89 cw(c83,87) 85,87 85,2 cw(c83,2) 83,0 2,0 cw(c2,2)
GND on Top Layer "GND_L01_P004" (solid, pour order 4): 0,2 0,87 cw(c2,87) 2,89 49.595,89 49.595,89.025 ccw(c50.795,89.025) 50.795,87.825 57.305,87.8 ccw(c57.305,89) 58.505,89 83,89 cw(c83,87) 85,87 85,2 cw(c83,2) 83,0 2,0 cw(c2,2)
GND on Top Ground "GND_L02_P005" (solid, pour order 5): 0,2 0,87 cw(c2,87) 2,89 49.595,89 49.595,89.025 ccw(c50.795,89.025) 50.795,87.825 57.305,87.8 ccw(c57.305,89) 58.505,89 83,89 cw(c83,87) 85,87 85,2 cw(c83,2) 83,0 2,0 cw(c2,2)

## Keep-outs
Keep-Out Layer:
  rectangle: 21.275,83.85 40.475,88.05
  rectangle: 36.796,65.203 40.275,67.178
  rectangle: 36.796,70.665 40.4,72.64
  rectangle: 65.75,18.7 68.725,20.675
  rectangle: 45.35,25.075 49.085,31.725
  rectangle: 32.125,27.025 37.175,31.65
  region: 84.65,67.375 78.275,67.375 78.275,17.175 84.65,17.175
  region: 76.875,0.05 76.875,6.425 26.675,6.425 26.675,0.05
  rectangle: 0.3,8.975 6.675,59.175
  rectangle: 0.3,59.825 6.625,80.075
  region: 15.25,20.55 15.35,20.45 15.35,13.875 25.9,13.875 25.95,13.925 25.95,15.575 28.875,15.575 28.9,15.55 28.925,15.575 28.925,20.5
  region: 69.2,37.375 64.25,37.375 64.25,28.7 64.175,28.625 60.8,28.625 60.8,26.35 60.775,26.325 69.2,26.325
  lines w0.254: 49.595,89 2,89 ccw(c2,87) 0,87 0,2 ccw(c2,2) 2,0 83,0 ccw(c83,2) 85,2 85,87 ccw(c83,87) 83,89 58.505,89 cw(c57.305,89) 57.305,87.8 50.795,87.825 cw(c50.795,89.025) 49.595,89.025

## Silkscreen, mask and mechanical layers (free items; w line width, h text height)
Top Overlay:
  drawing of 73 lines, arcs and shapes, not listed
  text "+12" at 4.479,79.021 h1.2 r270
  text "PWR IN" at 1.254,78.246 h1.2 r270
  text "GND" at 4.454,74.046 h1.2 r270
  text "CAN BUS" at 1.254,68.746 h1.2 r270
  text "H" at 4.454,67.846 h1.2 r270
  text "GND" at 80.496,63.204 h1.2 r90
  text "L" at 4.454,62.846 h1.2 r270
  text "0" at 80.471,59.329 h1.2 r90
  text "+5" at 4.454,57.546 h1.2 r270
  text "FLOW METER" at 1.254,57.246 h1.2 r270
  text "GND" at 80.496,53.204 h1.2 r90
  text "SIG" at 4.454,53.046 h1.2 r270
  text "1" at 80.471,49.529 h1.2 r90
  text "GND" at 4.454,48.146 h1.2 r270
  text "GND" at 80.496,43.204 h1.2 r90
  text "WP" at 4.479,42.621 h1.2 r270
  text "ACC CTRL" at 1.254,41.146 h1.2 r270
  text "2" at 80.471,39.329 h1.2 r90
  text "FAN" at 4.479,38.221 h1.2 r270
  text "GND" at 80.496,33.204 h1.2 r90
  text "GND" at 4.454,33.146 h1.2 r270
  text "NTC INPUT BANK #2" at 83.696,32.606 h1.2 r90
  text "3" at 80.471,29.329 h1.2 r90
  text "+12" at 4.479,28.121 h1.2 r270
  text "EXTRA IO" at 1.254,23.546 h1.2 r270
  text "GND" at 80.496,23.204 h1.2 r90
  text "GND" at 4.454,23.146 h1.2 r270
  text "4" at 80.471,19.329 h1.2 r90
  text "ADC" at 4.479,18.221 h1.2 r270
  text "GND" at 4.454,13.146 h1.2 r270
  text "9" at 28.829,4.229 h1.2
  text "GND" at 32.704,4.204 h1.2
  text "8" at 38.829,4.229 h1.2
  text "GND" at 42.704,4.204 h1.2
  text "7" at 48.829,4.229 h1.2
  text "GND" at 52.704,4.204 h1.2
  text "6" at 58.829,4.229 h1.2
  text "GND" at 62.704,4.204 h1.2
  text "5" at 68.829,4.229 h1.2
  text "GND" at 72.704,4.204 h1.2
  text "NTC INPUT BANK #1" at 42.306,1.004 h1.2
Bottom Overlay:
  text "Joao Gaspar 2210130 / MEAU 2023" at 50.791,84.225 h1

## Dimensions
83,89 to 82,0.127 on Top Overlay
0,87 to 85,87 on Top Overlay